# Altium PCB PCB 1.PcbDoc
Units mm, origin at the board's own origin, x right, y up, seen from the top; angles counter-clockwise.
Board outline 100 x 100 mm, 2 copper layers (Top Layer, Bottom Layer); 55 components, 94 nets, 349 pads, 0 vias.
Unrouted connection lines stored in the file: 6.
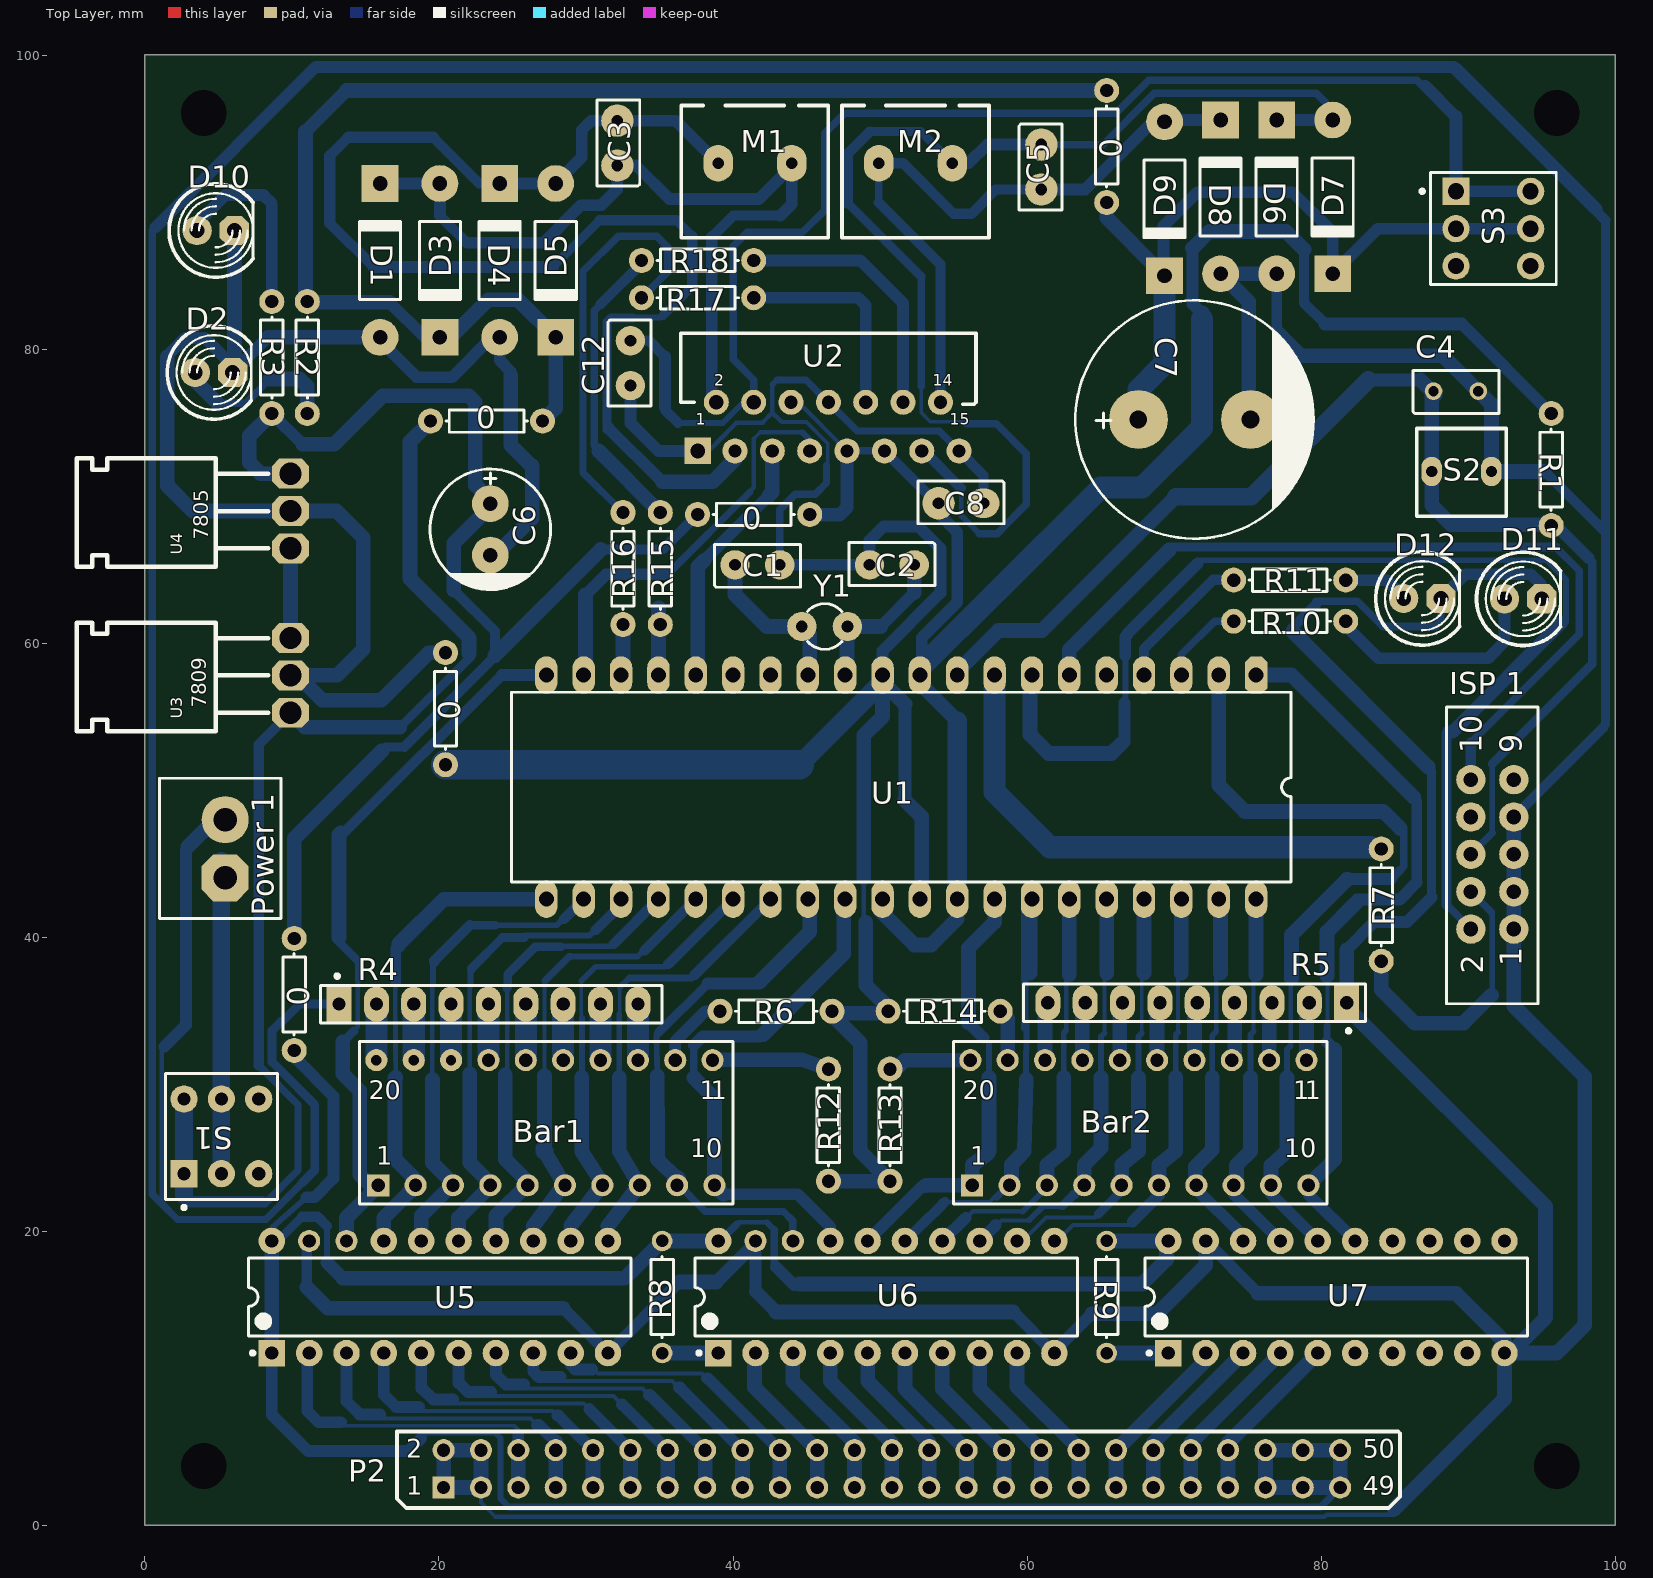
[diagram p0: Top Layer view]
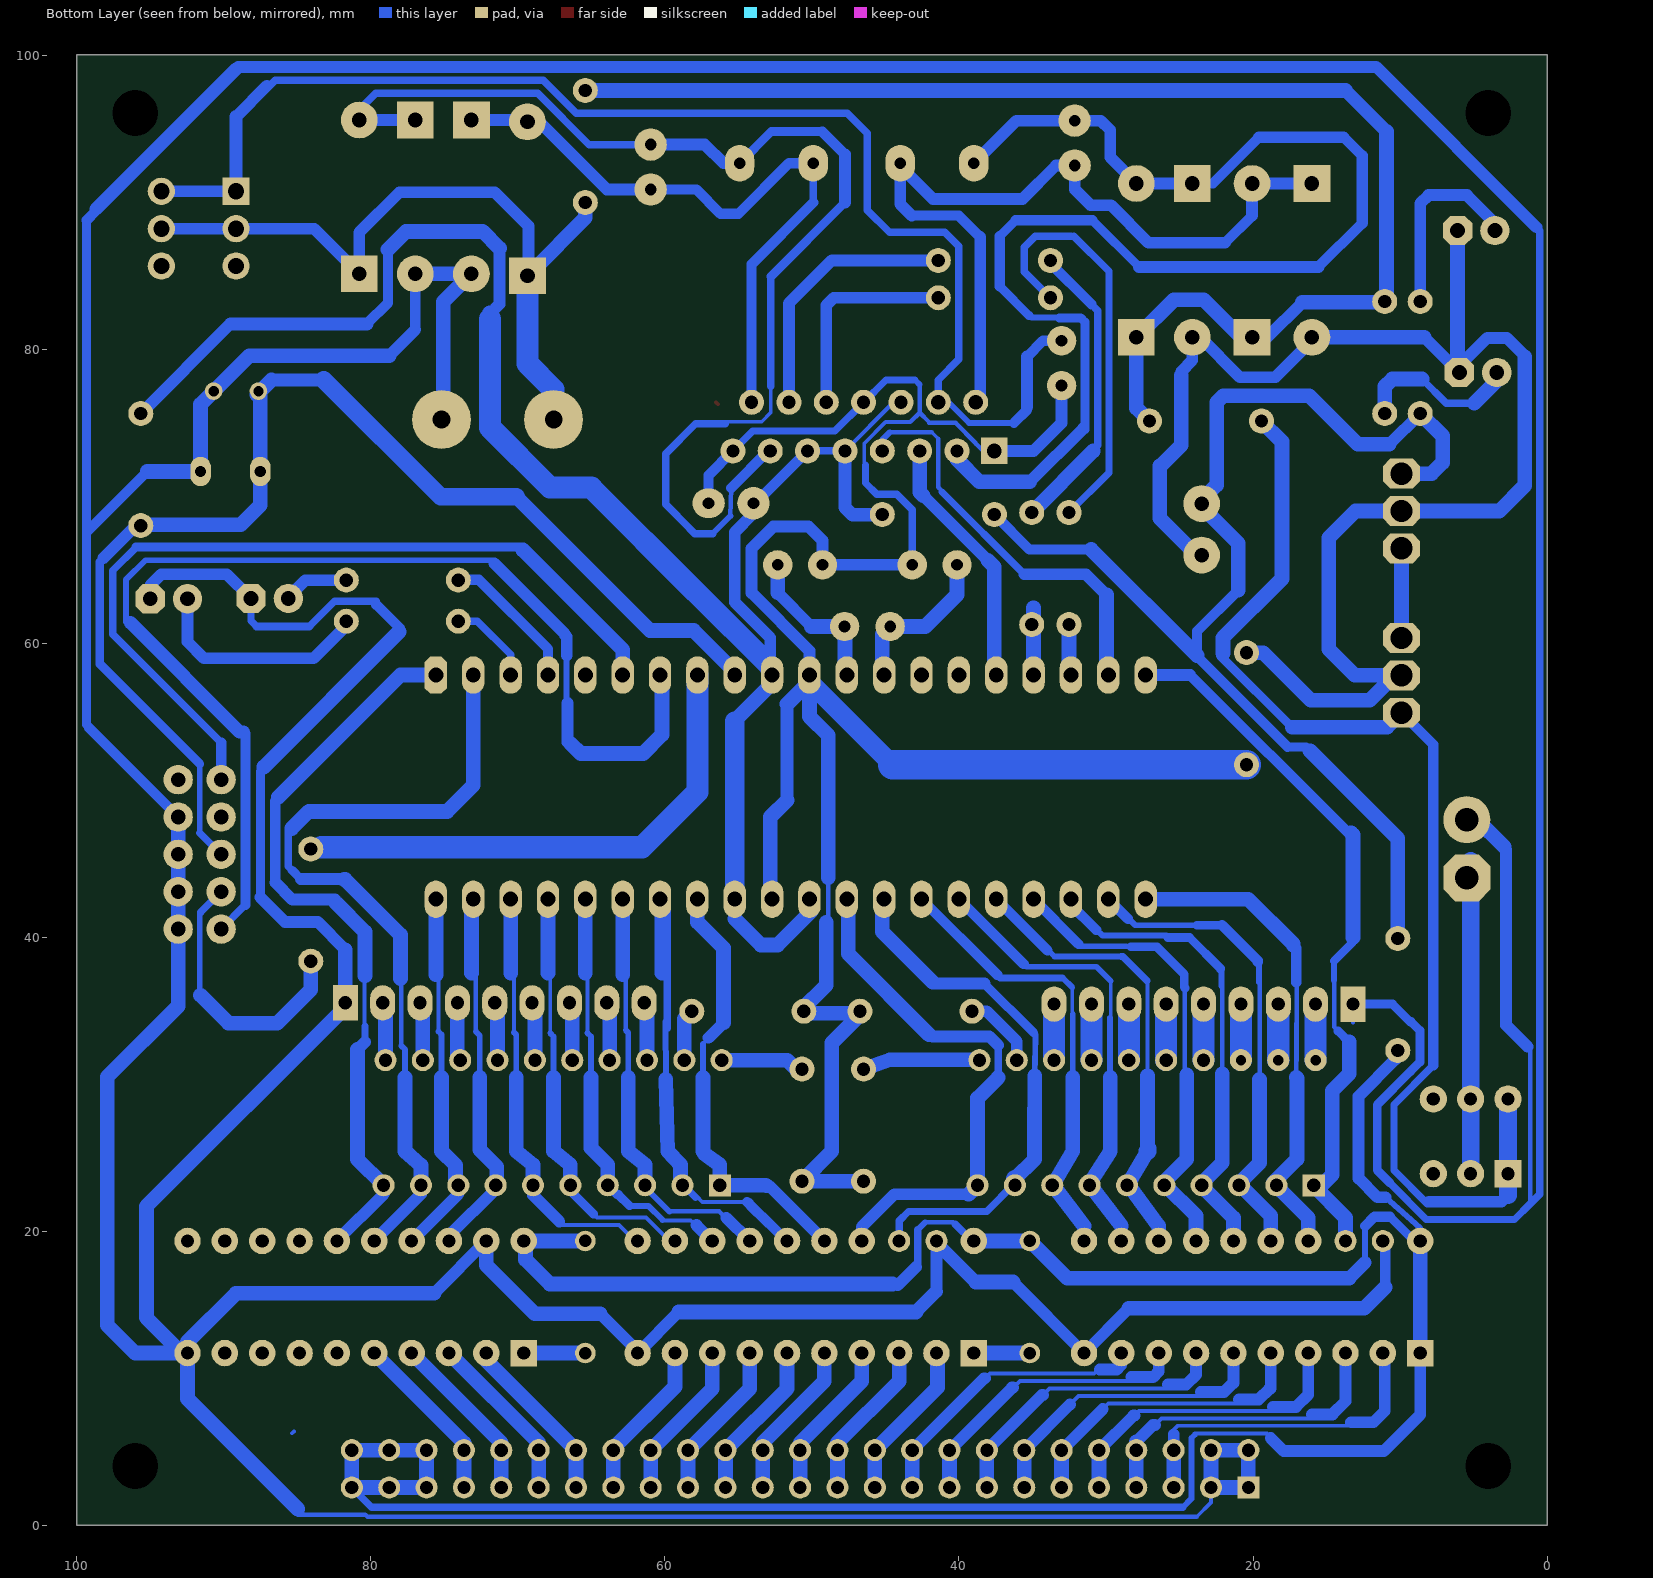
[diagram p1: Bottom Layer view, seen from below]

## Layer stack, top to bottom
Top Solder: solder mask 0.0102, Solder Resist, Dk 3.5
Top Layer: signal copper 0.0356
Dielectric 1: dielectric 0.32, FR-4, Dk 4.8
Bottom Layer: signal copper 0.0356
Bottom Solder: solder mask 0.0102, Solder Resist, Dk 3.5

## Board outline
0,0.041 0,100.041 100,100.041 100,0.041

## Design rules (kind name [scope] priority, off if disabled: settings)
Clearance [All] p1: gap=0.254 ignorepadtopadclearanceinfootprint=FALSE except(0: Arc-Hole Track-Hole SMDPad-Hole THPad-Hole Via-Hole Fill-Hole Poly-Hole Region-Hole Text-Hole)
PolygonConnect [All] p1: connectstyle=Relief reliefconductorwidth=0.254 reliefentries=4 polygonreliefangle="90 Angle" airgapwidth=0.254
RoutingLayers [All] p1: top layer_v5=FALSE bottom layer_v5=TRUE
RoutingVias [All] p1: holewidth=0.711 width=1.27 viastyle="Through Hole" minholewidth=0.711 minwidth=1.27 maxholewidth=0.711 maxwidth=1.27
SolderMaskExpansion [All] p1: expansion=0.102
Width [All] p1: maxlimit=2 minlimit=0.254 preferedwidth=0.254
29 further rules are at their usual default settings.

## Components (designator, comment, footprint, x,y, rotation, side; value= is the part's Value field where it differs from the comment)
Bar1 "Bar" "Bar 10z2"#1 26.924,27.473 r270 top
Bar2 "Bar" "Bar 10z2"#2 67.31,27.473 r270 top
C1 "" Cap#1 41.656,65.342 r0 top
C2 "" Cap#1 50.8,65.342 r180 top
C3 "" Cap#2 32.131,94.021 r90 top
C4 "" Cap#3 89.154,77.153 r0 top
C5 "" Cap#2 60.96,92.393 r270 top
C6 "+" "cap 03" 23.495,67.755 r90 top
C7 "+" "CAP 05" 71.374,75.225 r180 top
C8 "" Cap#4 55.499,69.533 r180 top
C12 "" Cap#1 33.02,79.058 r270 top
D1 "1N4007" DO-41 16.002,86.043 r90 top
D2 "LED" MY_LED5MM 4.699,78.423 r0 top
D3 "1N4007" DO-41 20.066,86.043 r270 top
D4 "1N4007" DO-41 24.13,86.043 r90 top
D5 "1N4007" DO-41 27.94,86.043 r270 top
D6 "1N4007" DO-41 76.962,90.361 r90 top
D7 "1N4007" DO-41 80.772,90.361 r270 top
D8 "1N4007" DO-41 73.152,90.361 r90 top
D9 "1N4007" DO-41 69.342,90.234 r270 top
D10 "LED" MY_LED5MM 4.826,88.075 r0 top
D11 "LED" MY_LED5MM 93.726,63.033 r0 top
D12 "LED" MY_LED5MM 86.868,63.056 r0 top
"ISP 1" "ISP 5X2" ISP 91.694,45.657 r90 top
M1 "Terminal" "Terminal 1*2" 46.482,96.584 r180 top
M2 "Terminal" "Terminal 1*2" 57.404,96.584 r180 top
P2 "Header 25X2H" Header 49.53,3.747 r0 top
"Power 1" "" Power 5.08,47.562 r90 top
R1 "" AXIAL-0.3#1 95.631,71.819 r90 top
R2 "1K" AXIAL-0.3#1 11.049,79.439 r270 top
R3 "220" AXIAL-0.3#1 8.636,79.439 r90 top
R4 "Resistor Array" "Res arrya" 13.208,35.474 r0 top
R5 "Resistor Array" "Res arrya" 81.724,35.56 r180 top
R6 "220" AXIAL-0.3#1 42.926,34.989 r0 top
R7 "" AXIAL-0.3#1 84.074,42.205 r90 top
R8 "" AXIAL-0.3#2 35.179,15.558 r270 top
R9 "" AXIAL-0.3#2 65.405,15.558 r270 top
R10 "" AXIAL-0.3#1 77.851,61.509 r180 top
R11 "" AXIAL-0.3#1 77.851,64.303 r180 top
R12 "220" AXIAL-0.3#1 46.482,27.242 r270 top
R13 "220" AXIAL-0.3#1 50.673,27.242 r270 top
R14 "220" AXIAL-0.3#1 54.356,34.989 r180 top
R15 "" AXIAL-0.3#1 35.052,65.088 r270 top
R16 "" AXIAL-0.3#1 32.512,65.088 r270 top
R17 "0" AXIAL-0.3#1 37.592,83.503 r0 top
R18 "0" AXIAL-0.3#1 37.592,86.043 r0 top
S1 "SW-DPDT" DPDT-6#1 5.207,26.48 r90 top
S2 "PB-2pin" PB-2pin 86.487,68.644 r0 top
S3 "SW-DPDT" DPDT-6#2 91.694,88.202 r0 top
U1 "ATmega16-16PI" My_40P6 51.435,50.229 r180 top
U2 "L298N" L298 46.482,88.964 r0 top
U5 "HD74HC245P" PRDP0020AC-B#1 20.066,15.558 r90 top
U6 "HD74HC245P" PRDP0020AC-B#1 50.419,15.558 r90 top
U7 "HD74HC245P" PRDP0020AC-B#2 81.026,15.558 r90 top
Y1 "XTAL" R38 46.228,61.151 r90 top

## Footprints (in the part's own frame and the unit in brackets; to place one, negate y for a bottom-side part, rotate by r counter-clockwise, add the part's x,y. Pads: shape width x height; smd on the part's side, far side on the other; paste and mask are expansions set on the pad)
AXIAL-0.3#1 [mm] "Axial Device, Thru-Hole; 2 Leads; 0.3 in Pin Spacing"
  round 1.7 hole 0.9: 1(-3.81,0) 2(3.81,0)
  silkscreen extent -2.77,-0.76 2.77,0.76
AXIAL-0.3#2 [mm] "Axial Device, Thru-Hole; 2 Leads; 0.3 in Pin Spacing"
  round 1.4 hole 0.85: 1(-3.81,0) 2(3.81,0)
  silkscreen extent -2.77,-0.76 2.77,0.76
"Bar 10z2"#1 [mm]
  rect 1.5x1.5 hole 0.9: 1(4.318,-11.049)
  round 1.5 hole 0.9: 2(4.318,-8.509) 3(4.318,-5.969) 4(4.318,-3.429) 5(4.318,-0.889) 6(4.318,1.651) 7(4.318,4.191) 8(4.318,6.731) 9(4.318,9.271) 10(4.318,11.811) 11(-4.191,11.684) 12(-4.191,9.144) 13(-4.191,6.604) 14(-4.191,4.064) 15(-4.191,1.524) 16(-4.191,-1.016) 17(-4.191,-3.556)
  round 1.5 hole 0.7: 18(-4.191,-6.096) 19(-4.191,-8.636) 20(-4.191,-11.176)
  silkscreen extent -5.46,-12.32 5.59,13.08
"Bar 10z2"#2 [mm]
  rect 1.5x1.5 hole 0.9: 1(4.318,-11.049)
  round 1.5 hole 0.9: 2(4.318,-8.509) 3(4.318,-5.969) 4(4.318,-3.429) 5(4.318,-0.889) 6(4.318,1.651) 7(4.318,4.191) 8(4.318,6.731) 9(4.318,9.271) 10(4.318,11.811) 11(-4.191,11.684) 12(-4.191,9.144) 13(-4.191,6.604) 14(-4.191,4.064) 15(-4.191,1.524) 16(-4.191,-1.016) 17(-4.191,-3.556) 18(-4.191,-6.096) 19(-4.191,-8.636) 20(-4.191,-11.176)
  silkscreen extent -5.46,-12.32 5.59,13.08
Cap#1 [mm]
  round 2 hole 0.8: 1(1.524,0) 2(-1.524,0)
  silkscreen extent -2.92,-1.52 2.92,1.4
Cap#2 [mm]
  round 2.2 hole 0.8: 1(1.524,0) 2(-1.524,0)
  silkscreen extent -2.92,-1.52 2.92,1.4
Cap#3 [mm]
  round 1.2 hole 0.7: 1(1.524,0) 2(-1.524,0)
  silkscreen extent -2.92,-1.52 2.92,1.4
Cap#4 [mm]
  round 2.2 hole 0.8: 1(1.524,0)
  oval 2.2x2 hole 0.8: 2(-1.524,0)
  silkscreen extent -2.92,-1.52 2.92,1.4
"cap 03" [mm]
  round 2.5 hole 1: 1(1.75,0) 2(-1.75,0)
  silkscreen extent -4.1,-4.1 4.1,4.1, body extent -4.05,-4.04 4,4.01, height 12.03
"CAP 05" [mm]
  round 4 hole 1.2: 1(3.81,0) 2(-3.81,0)
  silkscreen extent -8.1,-8.1 8.1,8.1, body extent -8.13,-8.13 8.12,8.12, height 16.53
DO-41 [mm] "Diode, Axial; Body 5.2 x 2.7 mm (LxDia. max), Lead Dia. 0.86 mm (max)"
  round 2.5 hole 1: 1(-5.23,0)
  rect 2.5x2.5 hole 1: 2(5.23,0)
  silkscreen extent -2.65,-1.4 2.75,1.4
DPDT-6#1 [mm] "Switch; 6 Leads"
  rect 1.85x1.85 hole 0.9: 1(-2.54,2.54)
  round 1.85 hole 0.9: 2(-2.54,0) 3(-2.54,-2.54) 4(2.54,-2.54) 5(2.54,0) 6(2.54,2.54)
  silkscreen extent -4.96,-3.81 4.28,3.81
DPDT-6#2 [mm] "Switch; 6 Leads"
  rect 1.85x1.85 hole 1.1: 1(-2.54,2.54)
  round 1.85 hole 1.1: 2(-2.54,0) 3(-2.54,-2.54) 4(2.54,-2.54) 5(2.54,0) 6(2.54,2.54)
  silkscreen extent -4.96,-3.81 4.28,3.81
Header [mm]
  rect 1.5x1.5 hole 0.9: 1(-29.21,-1.143)
  round 1.5 hole 0.9: 2(-29.21,1.397) 3(-26.67,-1.143) 4(-26.67,1.397) 5(-24.13,-1.143) 6(-24.13,1.397) 7(-21.59,-1.143) 8(-21.59,1.397) 9(-19.05,-1.143) 10(-19.05,1.397) 11(-16.51,-1.143) 12(-16.51,1.397) 13(-13.97,-1.143) 14(-13.97,1.397) 15(-11.43,-1.143) 16(-11.43,1.397) 17(-8.89,-1.143) 18(-8.89,1.397) 19(-6.35,-1.143) 20(-6.35,1.397) 21(-3.81,-1.143) 22(-3.81,1.397) 23(-1.27,-1.143) 24(-1.27,1.397) 25(1.27,-1.143) 26(1.27,1.397) 27(3.81,-1.143) 28(3.81,1.397) 29(6.35,-1.143) 30(6.35,1.397) 31(8.89,-1.143) 32(8.89,1.397) 33(11.43,-1.143) 34(11.43,1.397) 35(13.97,-1.143) 36(13.97,1.397) 37(16.51,-1.143) 38(16.51,1.397) 39(19.05,-1.143) 40(19.05,1.397) 41(21.59,-1.143) 42(21.59,1.397) 43(24.13,-1.143) 44(24.13,1.397) 45(26.67,-1.143) 46(26.67,1.397) 47(29.21,-1.143) 48(29.21,1.397) 49(31.75,-1.143) 50(31.75,1.397)
  Bottom Layer lines w0.254: 35.687,2.667 35.814,2.54
  silkscreen extent -32.38,-2.54 35.81,2.67
ISP [mm]
  round 2 hole 1: 1(-5.08,-1.397) 2(-5.08,1.524) 3(-2.54,-1.397) 4(-2.54,1.524) 5(0,-1.397) 6(0,1.524) 7(2.54,-1.397) 8(2.54,1.524) 9(5.08,-1.397) 10(5.08,1.524)
  silkscreen extent -10.16,-3.05 10.03,3.18
L298 [mm]
  rect 1.8x1.8 hole 1: 1(-8.89,-15.875)
  round 1.7 hole 1: 2(-7.62,-12.568) 4(-5.08,-12.568)
  round 1.7 hole 0.9: 3(-6.35,-15.875) 5(-3.81,-15.875) 6(-2.54,-12.568) 7(-1.27,-15.875) 8(0,-12.568) 9(1.27,-15.875) 10(2.54,-12.568) 11(3.81,-15.875) 12(5.08,-12.568) 13(6.35,-15.875) 14(7.62,-12.568) 15(8.89,-15.875)
  Top Layer lines w0.254: 9.906,-12.7 10.033,-12.573
  silkscreen extent -10.03,-12.7 10.03,-7.87
My_40P6 [mil]
  oct 60x100 hole 40: 1(-950,-300)
  oval 60x100 hole 40: 2(-850,-300) 3(-750,-300) 4(-650,-300) 5(-550,-300) 6(-450,-300) 7(-350,-300) 8(-250,-300) 9(-150,-300) 10(-50,-300) 11(50,-300) 12(150,-300) 13(250,-300) 14(350,-300) 15(450,-300) 16(550,-300) 17(650,-300) 18(750,-300) 19(850,-300) 20(950,-300) 21(950,300) 22(850,300) 23(750,300) 24(650,300) 25(550,300) 26(450,300) 27(350,300) 28(250,300) 29(150,300) 30(50,300) 31(-50,300) 32(-150,300) 33(-250,300) 34(-350,300) 35(-450,300) 36(-550,300) 37(-650,300) 38(-750,300) 39(-850,300) 40(-950,300)
  silkscreen extent -1043,-254 1043,254
MY_LED5MM [mm]
  round 2 hole 1: A(-1.27,0)
  oct 2x2 hole 1: K(1.27,0)
  silkscreen extent -3.17,-3.17 2.54,3.17
PB-2pin [mil] "Switch"
  oval 55.12x78.74 hole 30: 1(40,120) 2(200,120)
  silkscreen extent 0,0 240,235
Power [mm]
  oct 3.2x3.2 hole 1.6: 1(-3.503,-0.381)
  round 3.2 hole 1.6: 2(0.455,-0.381)
  silkscreen extent -6.25,-4.19 3.27,4.06
PRDP0020AC-B#1 [mm] "DIP, 20-Leads, Row Spacing 7.62mm, Pitch 2.54mm, Body 24.5x6.3mm"
  rect 1.8x1.8 hole 0.9: 1(-3.81,11.43)
  round 1.8 hole 0.9: 2(-3.81,8.89) 3(-3.81,6.35) 4(-3.81,3.81) 5(-3.81,1.27) 6(-3.81,-1.27) 7(-3.81,-3.81) 8(-3.81,-6.35) 9(-3.81,-8.89) 10(-3.81,-11.43) 11(3.81,-11.43) 12(3.81,-8.89) 13(3.81,-6.35) 14(3.81,-3.81) 15(3.81,-1.27) 16(3.81,1.27) 17(3.81,3.81) 20(3.81,11.43)
  round 1.5 hole 0.9: 18(3.81,6.35) 19(3.81,8.89)
  silkscreen extent -3.93,-13 2.65,13, body extent -3.6,-12.95 3.6,12.95, height 5.08
PRDP0020AC-B#2 [mm] "DIP, 20-Leads, Row Spacing 7.62mm, Pitch 2.54mm, Body 24.5x6.3mm"
  rect 1.8x1.8 hole 0.9: 1(-3.81,11.43)
  round 1.8 hole 0.9: 2(-3.81,8.89) 3(-3.81,6.35) 4(-3.81,3.81) 5(-3.81,1.27) 6(-3.81,-1.27) 7(-3.81,-3.81) 8(-3.81,-6.35) 9(-3.81,-8.89) 10(-3.81,-11.43) 11(3.81,-11.43) 12(3.81,-8.89) 13(3.81,-6.35) 14(3.81,-3.81) 15(3.81,-1.27) 16(3.81,1.27) 17(3.81,3.81) 18(3.81,6.35) 19(3.81,8.89) 20(3.81,11.43)
  silkscreen extent -3.93,-13 2.65,13, body extent -3.6,-12.95 3.6,12.95, height 5.08
R38 [mm] "Crystal, Thru-Hole; 2 Leads; Body 3.1 x 8.2 mm (Dia.xH)"
  round 2 hole 0.8: 1(0,1.55) 2(0,-1.55)
  silkscreen extent -1.55,-1.19 1.55,1.17
"Res arrya" [mm] "Resistor; Array;"
  rect 1.7x2.4 hole 0.9: 1(0,0)
  oval 1.7x2.4 hole 0.9: 2(2.54,0) 3(5.08,0) 4(7.62,0) 5(10.16,0) 6(12.7,0) 7(15.24,0) 8(17.78,0) 9(20.32,0)
  silkscreen extent -1.27,-1.27 21.97,2.03
"Terminal 1*2" [mil]
  oval 78.74x98.43 hole 30: 1(98.15,155) 2(295,155)
  silkscreen extent 0,0 394,354

## Part data
C1 C2 C3 C4 C5 C6 C7 C8 C12: library part Cap, "Capacitor"
D1 D3 D4 D5 D6 D7 D8 D9: library part "Diode 1N4007", "1 Amp General Purpose Rectifier"
D2 D10 D11 D12: "Typical INFRARED GaAs LED"
"ISP 1": library part "IDC 5X2", "Header, 5-Pin, Dual row"
M1 M2: library part "Terminal 1*2", "Terminal 2 Pin 250VAC 16A"
P2: "Header, 25-Pin, Dual row, Right Angle"
"Power 1": library part Power
R1 R2 R3 R6 R7 R8 R9 R10 R11 R12 R13 R14 R15 R16 R17 R18: library part Res1, "Resistor"
R4 R5: library part RES-A8
S1 S3: "Double-Pole, Double-Throw Switch"
S2: "Switch"
U1: "AVR 16K Bytes of In-System Programmable Flash Memory"
U2: "Dual Full Bridge Driver"
U5 U6 U7: "Octal Bus Transceivers with 3-State Outputs"
Y1: "Crystal Oscillator"

## Free pads (board coordinates)
  oct 0x0 hole 3.1: 1(4,4.064) 1(4,96.064) 1(96,4.064) 1(96,96.064)
  oct 2.54x2.032 hole 1.524: 1(9.906,55.286) 1(9.906,66.462) 2(9.906,57.826) 2(9.906,69.002) 3(9.906,60.366) 3(9.906,71.542)
  round 1.7 hole 0.9: 1(20.447,51.753) 1(27.051,75.121) 1(37.592,68.771) 1(65.405,89.98) 2(19.431,75.121) 2(20.447,59.373) 2(45.212,68.771) 2(65.405,97.6) ""(10.16,32.322) ""(10.16,39.942)

## Nets (pads, with @x,y where several pads share a name; then routed paths per layer and width w, separated by ;. In a path a pad name is that pad's centre, name@x,y a point inside that pad or via, vN(x,y) a via of type N, cw(c..) or ccw(c..) an arc to the next point about the centre after c; other vN are vias at no path point)
GND: "ISP 1.1" "ISP 1.3" "ISP 1.5" "ISP 1.7" "Power 1.2" C1.1 C2.1 C4.1 C6.2 C7.2 C8.2 C12.1 D1.1 D2.K D4.1 D6.1 D8.1 D10.K D11.K D12.K P2.1 P2.2 P2.3 P2.4 pad.1@20.447,51.753 pad.2@9.906,57.826 pad.2@9.906,69.002 pad.2@20.447,59.373 R4.1 R5.1 R6.2 R12.2 R13.2 R14.2 S2.2 U1.11 U1.31 U2.1 U2.8 U2.15 U5.10 U5.19 U6.10 U6.19 U7.10 U7.19 | length 909.6
  Bottom Layer w0.254: 4.773,48.017 5.461,48.017 ; D2.K D2.K@5.969,78.867 ; 9.271,34.29 9.334,34.29 9.525,34.29 ; 13.208,34.227 R4.1@13.208,34.862 ; D1.1@16.002,80.582 D1.1 ; P2.3 22.86,1.588 23.832,0.616 ; C6.2 C6.2@23.841,66.005 ; D4.1@23.599,80.813 D4.1 ; 26.29,72.071 26.352,72.071 ; U2.1 U2.1@38.354,73.089 ; 38.851,73.586 38.851,73.62 ; U6.19@41.529,19.241 U6.19 ; 42.037,74.994 42.037,75.057 ; 44.985,75.057 46.443,73.599 46.443,72.224 46.355,72.136 ; 48.895,41.148 49.022,41.021 ; R14.2@50.419,34.862 R14.2 ; U6.10 U6.10@61.849,11.875 ; C7.2@75.057,75.352 C7.2 ; U7.10@92.456,12.51 U7.10 U7.10@92.837,11.748 ; D11.K D11.K@94.996,63.945
  Bottom Layer w0.3: 1.143,21.908 1.143,32.385 1.333,32.575 ; 23.832,0.616 80.217,0.616 80.363,0.762 84.963,0.762 ; U2.1@38.354,73.089 38.851,73.586 ; 38.851,73.62 40.225,74.994 42.037,74.994 ; 42.037,75.057 42.672,75.692 43.307,75.057 44.985,75.057 ; 42.672,75.819 42.672,77.597 ; 48.895,41.148 48.895,44.069
  Bottom Layer w0.4: 42.672,77.597 42.99,77.915
  Bottom Layer w0.5: 0.508,88.075 0.508,22.543 1.143,21.908 2.223,20.828 8.214,20.828 10.673,23.287 ; pad.2@9.906,57.826 pad.2@10.373,57.826 ; 42.99,77.915 44.963,77.915 U2.8 48.435,74.443 54.018,74.443 U2.15 ; C1.1 43.18,69.088 44.237,70.145 45.593,70.145 46.355,70.907 46.355,72.136 ; 79.629,62.865 82.464,62.865 84.178,61.151 ; 87.757,61.151 88.138,61.532 D12.K
  Bottom Layer w0.56: 84.178,61.151 87.757,61.151
  Bottom Layer w0.6: 9.271,34.29 8.651,33.67 8.651,31.545 9.303,30.893 ; 9.3,30.89 11.557,28.633 11.557,24.177 10.67,23.29 ; 9.303,34.259 9.334,34.29 10.518,35.474 R4.1@12.596,35.474 ; U1.11@50.165,57.404 U1.11 ; 87.503,42.736 87.503,51.308 ; 99.314,54.483 99.314,88.773
  Bottom Layer w0.7: 11.011,16.23 U5.19@11.011,19.203 ; U2.15 57.023,71.438 C8.2 ; 76.962,81.344 D6.1 ; 78.018,61.047 79.581,62.611 79.629,62.611 ; 93.091,48.197 99.155,54.261 ; 95.186,71.692 97.838,69.04 99.187,67.691 ; 98.679,89.408 99.314,88.773
  Bottom Layer w0.8: 0.73,88.297 11.635,99.202 89.012,99.202 89.154,99.06 ; 1.333,32.575 2.794,34.036 2.794,45.974 2.921,46.101 ; 1.504,79.522 2.753,80.772 4.064,80.772 D2.K@5.969,78.867 ; D2.K 6.096,78.55 8.359,80.813 ; D1.1@16.002,80.582 18.479,78.105 20.891,78.105 D4.1@23.599,80.813 ; D4.1 24.13,79.248 24.892,78.486 24.892,78.232 ; 28.448,14.796 U5.10 36.322,16.574 ; C12.1 33.02,74.994 34.925,73.089 U2.1 ; 41.529,15.939 U6.19@41.529,19.241 ; C1.1 C2.1 49.276,66.993 50.228,67.945 52.619,67.945 54.102,66.462 54.102,63.437 50.165,59.5 U1.11 ; 59.055,14.542 U6.10 ; U6.10@61.849,11.875 64.389,14.415 ; U7.19 75.692,15.812 ; 76.962,81.344 78.74,79.566 ; 81.724,39.179 83.607,41.062 85.829,41.062 87.503,42.736 ; D12.K 89.789,64.707 94.234,64.707 D11.K@94.996,63.945
  Bottom Layer w0.9: 38.862,16.574 U6.19@41.529,19.241 ; 41.529,15.939 42.926,14.542 ; 51.689,49.34 51.689,55.88 ; 89.154,99.06 98.679,89.535
  Bottom Layer w1: 1.524,79.502 1.524,70.739 3.261,69.002 9.906,69.002 13.04,69.002 14.859,67.183 14.859,59.604 13.081,57.826 10.373,57.826 12.065,56.134 16.065,56.134 19.304,59.373 pad.2@20.447,59.373 ; 2.921,46.165 4.773,48.017 ; D2.K@6.096,78.55 D10.K ; 8.359,80.813 D1.1 ; 11.011,16.23 12.445,14.796 28.448,14.796 ; C6.2@23.841,66.005 26.352,68.516 26.352,72.071 ; 24.892,78.232 24.892,73.469 26.29,72.071 ; 36.322,16.574 38.862,16.574 ; 42.926,14.542 59.055,14.542 ; R12.2 R13.2 48.641,25.464 48.641,32.83 R6.2@46.736,34.735 ; R6.2@46.736,34.862 R14.2@50.419,34.862 ; 48.895,44.069 48.895,53.762 50.165,55.032 50.165,57.404 51.689,55.88 ; 49.022,41.021 49.022,36.767 R14.2@50.673,35.116 ; 51.689,49.34 52.832,48.197 U1.31@52.832,42.609 ; 64.389,14.415 68.834,14.415 72.136,17.717 U7.19 ; C7.2@75.057,75.352 75.057,83.226 D8.1 D6.1@76.685,85.131 ; 75.692,15.812 89.154,15.812 U7.10@92.456,12.51 ; 78.073,60.802 87.281,51.594 ; 78.74,79.566 88.265,79.566 C4.1 91.567,76.264 S2.2 95.186,71.692 ; 81.724,39.179 R5.1 81.724,35.243 95.25,21.717 95.25,14.161 92.837,11.748 96.012,11.748 97.917,13.653 97.917,30.521 93.091,35.347 93.091,40.577 93.091,43.117 93.091,45.657 93.091,48.197 ; 84.963,1.143 92.456,8.636 U7.10 ; P2.1 P2.2 P2.4 P2.3 P2.1
  Bottom Layer w1.3: 44.514,51.753 U1.11@50.165,57.404
  Bottom Layer w2: pad.1@20.447,51.753 44.514,51.753
NetBar1_1: Bar1.1 U1.20 U5.18 | length 49.4
  Bottom Layer w0.254: Bar1.1@15.367,23.114 Bar1.1@15.875,23.114
  Bottom Layer w0.3: 14.224,33.655 14.489,33.92 14.489,37.084
  Bottom Layer w0.4: 14.489,37.084 14.489,38.406
  Bottom Layer w0.55: 13.208,40.005 13.208,39.687 14.489,38.406
  Bottom Layer w0.6: 13.462,32.893 14.224,33.655
  Bottom Layer w0.7: 13.335,47.117 13.543,47.117 24.275,57.849
  Bottom Layer w0.8: 24.275,57.849 U1.20
  Bottom Layer w1: 13.208,40.005 13.208,46.99 13.335,47.117 ; 13.462,32.893 13.462,30.734 14.617,29.579 14.617,23.864 Bar1.1@15.367,23.114 ; U5.18 13.716,20.955 Bar1.1@15.875,23.114
NetBar1_2: Bar1.2 U1.21 U5.17 | length 35.9
  Bottom Layer w0.254: 17.018,36.664 17.057,36.703 17.057,36.957
  Bottom Layer w0.3: 17.018,31.623 17.018,36.664 ; 17.057,30.48 17.057,34.163
  Bottom Layer w0.7: 17.057,36.957 17.057,39.282 17.272,39.497
  Bottom Layer w1: U5.17 16.256,20.955 18.435,23.134 18.626,23.325 17.018,24.933 17.018,30.441 17.057,30.48 ; 17.272,39.497 17.272,39.561 20.32,42.609 U1.21 U1.21@27.432,42.609
NetBar1_3: Bar1.3 U1.22 U5.16 | length 32.4
  Bottom Layer w0.3: 19.558,30.353 19.558,36.918
  Bottom Layer w0.4: 19.597,36.957 19.597,38.266 19.685,38.354 ; 23.806,40.84 28.013,40.84 28.448,41.275
  Bottom Layer w0.6: 22.107,40.84 23.806,40.84
  Bottom Layer w0.7: 19.685,38.354 19.685,38.418 22.107,40.84 ; 28.511,41.275 U1.22
  Bottom Layer w1: U5.16 18.796,21.082 20.912,23.198 20.975,23.261 19.558,24.679 19.558,30.353
NetBar1_4: Bar1.4 U1.23 U5.15 | length 32.3
  Bottom Layer w0.254: 22.098,36.664 22.137,36.703 ; U1.23@32.385,42.228 U1.23
  Bottom Layer w0.3: 22.098,30.734 22.098,36.664
  Bottom Layer w0.4: 22.137,36.703 22.137,37.758 22.225,37.846 ; 25.781,40.005 25.908,40.132 30.226,40.132 30.607,40.513
  Bottom Layer w0.6: 22.225,37.846 22.225,37.91 24.32,40.005 25.781,40.005
  Bottom Layer w0.7: 30.67,40.513 U1.23@32.385,42.228
  Bottom Layer w1: U5.15 21.336,20.955 23.515,23.134 23.579,23.198 22.098,24.679 22.098,28.575 ; 22.098,28.702 22.098,30.734
NetBar1_5: Bar1.5 U1.24 U5.14 | length 31.5
  Bottom Layer w0.3: 24.638,30.734 24.638,36.576
  Bottom Layer w0.4: 28.616,39.411 31.75,39.411
  Bottom Layer w0.6: 24.638,36.576 24.677,36.615 24.677,37.504 26.543,39.37 28.321,39.37
  Bottom Layer w0.7: 31.876,39.56 U1.24
  Bottom Layer w1: U5.14 23.876,21.082 25.992,23.198 26.119,23.325 24.511,24.933 24.511,30.671
NetBar1_6: Bar1.6 U1.25 U5.13 | length 32.1
  Bottom Layer w0.254: 27.178,37.021 27.21,37.053 ; Bar1.6@28.575,22.543 Bar1.6 Bar1.6@28.575,23.409
  Bottom Layer w0.3: 27.178,30.607 27.178,37.021
  Bottom Layer w0.4: 28.978,38.707 33.5,38.707 33.909,39.116
  Bottom Layer w0.5: 27.21,37.053 28.864,38.707 28.978,38.707
  Bottom Layer w0.7: 33.972,39.116 U1.25
  Bottom Layer w1: U5.13 26.416,20.384 Bar1.6@28.369,23.045 ; 27.067,25.664 27.178,25.476 ; 27.178,28.575 27.178,25.476 ; 27.178,28.702 27.178,30.607 ; Bar1.6@28.552,23.141 27.178,25.476
  Bottom Layer w1.2: 27.178,25.464 27.178,25.476
NetBar1_7: Bar1.7 U1.26 U5.12 | length 30.6
  Bottom Layer w0.254: U5.12 28.956,20.384 ; 29.679,34.55 29.679,37.045
  Bottom Layer w0.4: 29.679,37.045 30.648,38.014 35.41,38.014 35.592,38.196 ; 29.718,30.48 29.718,34.55
  Bottom Layer w0.7: 35.592,38.196 U1.26
  Bottom Layer w1: 28.956,20.384 Bar1.7@30.928,22.956 ; 29.718,28.575 29.718,25.464 Bar1.7@30.928,23.543 ; 29.718,28.702 29.718,30.48
NetBar1_8: Bar1.8 U1.27 U5.11 | length 31.2
  Bottom Layer w0.254: U5.11 31.496,20.384 ; 32.297,34.55 32.297,36.615 ; Bar1.8@33.614,23.155 Bar1.8
  Bottom Layer w0.4: 32.258,30.48 32.258,34.804 ; 32.297,36.615 32.934,37.252 32.956,37.252 32.959,37.249 ; 34.167,37.249 34.17,37.252 ; 37.188,37.252 37.401,37.465
  Bottom Layer w0.5: 32.959,37.249 34.167,37.249 ; 34.17,37.252 37.188,37.252
  Bottom Layer w0.7: 37.401,37.465 U1.27
  Bottom Layer w1: 31.496,20.384 33.614,23.155 32.258,25.464 32.258,28.575 ; 32.258,28.702 32.258,30.48
NetBar1_9: Bar1.9 U1.28 U6.18 | length 36.3
  Bottom Layer w0.254: 34.798,33.401 34.925,33.528
  Bottom Layer w0.4: 34.798,33.401 34.843,30.607
  Bottom Layer w0.5: Bar1.9@36.195,23.282 38.1,21.377 43.434,21.377 44.069,20.742 U6.18
  Bottom Layer w0.6: 34.925,33.528 38.268,36.871
  Bottom Layer w0.8: 38.268,36.871 41.57,36.871
  Bottom Layer w1: 34.843,30.607 34.843,29.654 34.861,27.305 34.861,24.931 Bar1.9@36.195,23.597 ; 41.783,36.957 45.212,40.386 U1.28@45.212,42.482
  Bottom Layer w1.2: Bar1.9 36.195,23.282 Bar1.9@36.195,23.597
NetBar1_10: Bar1.10 U1.29 U6.17 | length 36.5
  Bottom Layer w0.254: U1.29@47.53,42.387 U1.29@47.752,42.609
  Bottom Layer w0.5: 37.338,30.48 37.338,32.68
  Bottom Layer w0.8: 37.338,32.68 37.932,33.274 41.783,33.274 41.91,33.401 ; 39.347,22.543 44.386,22.543 46.609,20.32 U6.17
  Bottom Layer w1: 37.338,30.48 38.735,29.083 Bar1.10 39.347,22.543 ; 42.037,33.401 47.53,38.894 U1.29@47.53,42.387
NetBar1_11: Bar1.11 R12.1 | length 7.7
  Bottom Layer w1: Bar1.11@38.862,31.687 44.695,31.687 R12.1
NetBar1_12: Bar1.12 R6.1 | length 5.2
  Bottom Layer w0.8: Bar1.12 36.068,32.934 38.123,34.989 R6.1
NetBar1_13: Bar1.13 R4.9 | length 3.6
  Bottom Layer w1.5: Bar1.13@33.528,31.877 R4.9
NetBar1_14: Bar1.14 R4.8 | length 3.6
  Bottom Layer w1.5: Bar1.14 R4.8@30.988,35.22
NetBar1_15: Bar1.15 R4.7 | length 3.8
  Bottom Layer w1.5: Bar1.15 R4.7
NetBar1_16: Bar1.16 R4.6 | length 3.8
  Bottom Layer w1.5: Bar1.16 R4.6
NetBar1_17: Bar1.17 R4.5 | length 3.8
  Bottom Layer w1.5: Bar1.17 R4.5
NetBar1_18: Bar1.18 R4.4 | length 3.6
  Bottom Layer w1.5: Bar1.18 R4.4@20.828,35.22
NetBar1_19: Bar1.19 R4.3 | length 3.4
  Bottom Layer w1.5: Bar1.19 R4.3@18.288,35.093
NetBar1_20: Bar1.20 R4.2 | length 3.7
  Bottom Layer w1.5: Bar1.20 R4.2@15.748,35.347
NetBar2_1: Bar2.1 U1.33 U6.16 | length 30.1
  Bottom Layer w0.254: U6.16 U6.16@49.149,19.495 ; 57.023,33.147 57.404,32.766 ; 57.328,25.311 57.404,25.464
  Bottom Layer w0.4: 57.404,30.48 57.404,32.766
  Bottom Layer w0.8: U6.16 52.895,23.114 53.086,23.114 ; 56.007,34.204 57.023,33.188
  Bottom Layer w1: 53.086,23.114 53.127,23.155 Bar2.1 56.261,24.552 ; 56.007,34.204 56.007,39.284 57.785,41.062 U1.33 ; 56.274,24.552 57.328,25.311 ; 57.404,25.464 57.404,30.48
NetBar2_2: Bar2.2 U1.34 U6.15 | length 34.3
  Bottom Layer w0.254: 53.721,21.336 54.013,21.628 ; 54.409,22.024 57.457,22.024 57.785,22.352
  Bottom Layer w0.4: 59.932,30.353 59.944,34.29
  Bottom Layer w0.5: 57.912,22.352 Bar2.2@58.928,23.368 ; 59.842,33.811 59.842,42.316 U1.34@60.071,42.545
  Bottom Layer w0.7: U6.15 54.013,21.628 54.409,22.024
  Bottom Layer w1: Bar2.2@58.928,23.368 58.928,24.552 59.805,25.464 59.932,30.353 ; 60.198,37.592 U1.34@60.198,42.609
NetBar2_3: Bar2.3 U1.35 U6.14 | length 30.2
  Bottom Layer w0.3: 55.88,20.955 56.302,21.377 59.69,21.377 ; 62.635,39.14 62.635,37.361 62.658,37.338 62.658,33.702
  Bottom Layer w0.4: 59.69,21.377 Bar2.3@61.341,23.028 ; 62.484,30.48 62.484,33.528 62.658,33.702
  Bottom Layer w0.8: U6.14 55.816,20.955
  Bottom Layer w1: Bar2.3@61.341,23.028 Bar2.3 61.341,24.552 62.484,25.464 62.484,30.48 ; 62.865,37.465 U1.35@62.865,42.355
NetBar2_4: Bar2.4 U1.36 U6.13 | length 30.3
  Bottom Layer w0.254: 57.912,20.447 58.23,20.765 60.161,20.765 ; 65.253,33.503 65.253,39.243
  Bottom Layer w0.4: 60.161,20.802 61.117,21.758 62.398,21.758 ; 65.024,30.48 65.024,33.274 65.253,33.503
  Bottom Layer w0.6: 62.398,21.758 63.16,22.52 63.246,22.52 Bar2.4
  Bottom Layer w0.8: U6.13 57.848,20.447
  Bottom Layer w1: Bar2.4 63.881,24.552 65.024,25.695 65.024,30.48 ; 65.405,37.592 U1.36
NetBar2_5: Bar2.5 U1.37 U6.12 | length 29.9
  Bottom Layer w0.254: U6.12 59.69,19.368 61.279,20.957 64.604,20.957 64.856,21.209 ; Bar2.5@66.421,22.774 Bar2.5 ; 67.793,33.503 67.793,38.481
  Bottom Layer w0.4: 67.564,30.48 67.564,33.274 67.793,33.503
  Bottom Layer w0.6: 64.856,21.209 Bar2.5@66.421,22.774
  Bottom Layer w1: Bar2.5 66.421,24.552 67.564,25.464 67.564,30.48 ; 67.945,37.592 U1.37
NetBar2_6: Bar2.6 U1.38 U6.11 | length 29.5
  Bottom Layer w0.254: U6.11 62.038,19.368 63.119,20.449 67.183,20.449 ; 70.255,33.552 70.255,38.481
  Bottom Layer w0.4: 70.104,30.861 70.104,33.401 70.255,33.552
  Bottom Layer w0.6: Bar2.6@68.961,22.479 Bar2.6
  Bottom Layer w0.8: 67.183,20.701 Bar2.6@68.961,22.479
  Bottom Layer w1: Bar2.6 68.961,24.552 70.104,25.464 70.104,30.48 ; 70.485,37.592 U1.38
NetBar2_7: Bar2.7 U1.39 U7.18 | length 25.8
  Bottom Layer w0.3: 72.85,33.607 72.85,37.719 72.873,37.742 72.873,38.608
  Bottom Layer w0.4: 72.58,30.48 72.58,33.337 72.85,33.607
  Bottom Layer w0.8: Bar2.7@71.438,22.964 U7.18@74.676,19.726
  Bottom Layer w1: Bar2.7@71.438,22.964 71.438,24.425 72.58,25.567 72.58,30.48 ; 73.14,37.592 U1.39@73.14,42.609
NetBar2_8: Bar2.8 U1.40 U7.17 | length 25.4
  Bottom Layer w0.254: Bar2.8@74.041,22.543 Bar2.8 Bar2.8@74.231,23.345
  Bottom Layer w0.3: 75.39,33.607 75.39,37.211 75.413,37.234 75.413,38.075
  Bottom Layer w0.4: 75.184,30.861 75.184,33.401 75.39,33.607
  Bottom Layer w0.8: Bar2.8@74.041,22.543 U7.17
  Bottom Layer w1: Bar2.8@74.231,23.345 74.231,24.511 75.184,25.464 75.184,30.48 ; 75.565,37.465 U1.40
NetBar2_9: Bar2.9 U1.2 U7.16 | length 55.8
  Bottom Layer w0.254: Bar2.9@76.581,22.543 Bar2.9 ; 77.914,37.147 77.978,37.211
  Bottom Layer w0.3: 77.914,32.639 77.914,37.147
  Bottom Layer w0.4: 77.66,30.48 77.66,32.385 77.914,32.639
  Bottom Layer w0.5: 85.344,44.577 85.598,44.831 85.598,47.244
  Bottom Layer w0.6: 84.75,43.983 85.344,44.577
  Bottom Layer w0.8: Bar2.9@76.581,22.543 U7.16 ; 81.788,43.942 81.829,43.983 84.75,43.983
  Bottom Layer w1: U1.2 73.025,50.356 74.803,48.578 84.201,48.578 85.36,47.419 ; Bar2.9 76.581,24.511 77.66,25.464 77.66,30.48 ; 77.978,37.211 77.978,40.196 81.724,43.942 81.788,43.942
NetBar2_10: Bar2.10 U1.1 U7.15 | length 49.2
  Bottom Layer w0.254: 80.391,33.973 80.415,33.997 80.415,37.084
  Bottom Layer w0.5: 80.391,32.893 80.391,33.973
  Bottom Layer w0.7: 86.487,43.752 86.487,49.276
  Bottom Layer w0.8: Bar2.10@79.121,22.543 U7.15 ; 80.391,32.893 80.899,32.385 ; 82.423,42.586 85.321,42.586 86.487,43.752
  Bottom Layer w1: U1.1@75.692,57.849 77.978,57.849 86.265,49.562 ; Bar2.10 80.899,24.933 80.899,32.385 ; 80.391,37.402 80.391,40.386 82.359,42.355
NetBar2_11: Bar2.11 R5.2 | length 4.6
  Bottom Layer w0.254: Bar2.11@78.994,31.052 Bar2.11 ; R5.2@78.994,34.966 R5.2@79.502,35.474
  Bottom Layer w1: Bar2.11 R5.2@78.994,34.966
NetBar2_12: Bar2.12 R5.3 | length 5
  Bottom Layer w0.254: Bar2.12@76.454,31.052 Bar2.12 ; R5.3@76.454,34.966 76.962,35.474 R5.3@76.962,35.855
  Bottom Layer w1: Bar2.12 R5.3@76.454,34.966
NetBar2_13: Bar2.13 R5.4 | length 4.4
  Bottom Layer w0.254: Bar2.13 Bar2.13@74.104,31.854 ; R5.4@74.104,35.156 74.422,35.474 R5.4@74.422,35.855
  Bottom Layer w1: Bar2.13@74.104,31.854 R5.4@74.104,35.156
NetBar2_14: Bar2.14 R5.5 | length 4.4
  Bottom Layer w0.254: R5.5@71.374,34.966 71.882,35.474 R5.5@71.882,35.855
  Bottom Layer w1: Bar2.14 R5.5@71.374,34.966
NetBar2_15: Bar2.15 R5.6 | length 4.4
  Bottom Layer w0.254: R5.6@68.834,34.966 69.342,35.474 R5.6@69.342,35.855
  Bottom Layer w1: Bar2.15 R5.6@68.834,34.966
NetBar2_16: Bar2.16 R5.7 | length 4.6
  Bottom Layer w0.254: Bar2.16@66.294,31.052 Bar2.16@66.675,31.433 ; R5.7@66.294,34.966 R5.7@66.802,35.474
  Bottom Layer w1: Bar2.16 R5.7@66.294,34.966
NetBar2_17: Bar2.17 R5.8 | length 4.4
  Bottom Layer w0.254: R5.8@63.754,35.093 64.262,35.601 R5.8@64.262,35.855
  Bottom Layer w1: Bar2.17 R5.8@63.754,35.093
NetBar2_18: Bar2.18 R5.9 | length 5.9
  Bottom Layer w0.254: R5.9@60.833,35.56 R5.9 ; Bar2.18@61.214,31.052 Bar2.18@61.849,31.687 ; R5.9@61.214,34.966 61.722,35.474 R5.9@61.722,35.855
  Bottom Layer w1: Bar2.18 R5.9@61.214,34.966
NetBar2_19: Bar2.19 R14.1 | length 4.1
  Bottom Layer w0.254: Bar2.19@58.42,31.306 Bar2.19@58.778,31.664
  Bottom Layer w1: R14.1 58.674,34.481 Bar2.19 Bar2.19@58.778,31.664
NetBar2_20: Bar2.20 R13.1 | length 5.7
  Bottom Layer w0.254: R13.1 R13.1@51.077,31.052
  Bottom Layer w1: R13.1@51.077,31.052 51.689,31.664 Bar2.20
NetC1_2: C1.2 U1.13 Y1.1 | length 11.2
  Bottom Layer w0.254: Y1.1 Y1.1@45.212,60.617
  Bottom Layer w1: C1.2 40.132,63.31 42.291,61.151 Y1.1 ; U1.13@45.212,57.595 Y1.1@45.212,60.617
NetC2_2: C2.2 U1.12 Y1.2 | length 10.7
  Bottom Layer w0.254: Y1.2@47.752,61.125 Y1.2
  Bottom Layer w0.8: 50.038,61.151 52.324,63.437
  Bottom Layer w1: U1.12@47.752,57.849 Y1.2@47.752,61.125 ; Y1.2 50.038,61.151 ; 52.324,63.437 C2.2
NetC3_1: C3.1 D4.2 D5.1 M1.2 U2.3 | length 93.1
  Bottom Layer w0.254: 22.749,91.273 D4.2 ; 33.163,82.136 33.196,82.169
  Bottom Layer w0.4: 33.196,82.169 35.052,82.169
  Bottom Layer w0.6: 27.749,85.598 30.924,88.773 ; 31.432,74.549 31.432,81.851 31.717,82.136 33.163,82.136 ; 35.242,82.296 37.221,84.275 ; 36.132,88.773 37.221,87.684
  Bottom Layer w0.7: 12.573,88.582 15.557,85.598 ; 12.573,93.155 13.843,94.425 ; 19.597,94.425 22.749,91.273 ; 30.924,88.773 36.132,88.773 ; 37.221,84.275 37.221,87.684
  Bottom Layer w0.8: 12.573,88.582 12.573,93.155 ; 13.843,94.425 19.597,94.425 ; 15.557,85.598 27.749,85.598 ; D4.2 D5.1 29.718,93.051 29.718,94.91 30.353,95.545 C3.1 36.091,95.545 M1.2 ; 31.527,74.645 35.179,70.993
  Bottom Layer w1: 35.179,70.993 38.608,70.993 40.132,72.517 U2.3
NetC3_2: C3.2 D1.2 D3.1 M1.1 U2.2 | length 56.4
  Bottom Layer w0.254: U2.2@38.544,76.714 U2.2 ; M1.1@43.989,92.44 M1.1
  Bottom Layer w0.7: 20.066,89.09 21.907,87.249 ; 38.544,87.63 40.005,89.091 43.203,89.091
  Bottom Layer w0.8: D1.2 D3.1 20.066,89.09 ; 21.907,87.249 27.114,87.249 29.654,89.789 31.051,89.789 32.131,90.869 C3.2 33.401,92.497 35.687,90.211 41.76,90.211 43.989,92.44 43.989,89.877 43.203,89.091 ; U2.2@38.544,76.714 38.544,87.63
NetC4_2: "ISP 1.6" C4.2 R1.1 S2.1 U1.9 | length 85.6
  Bottom Layer w0.254: U1.9@54.737,57.849 U1.9@54.991,57.849 ; U1.9@55.003,57.837 U1.9@54.991,57.849 ; U1.9 55.014,57.849 U1.9@54.991,57.849 ; 98.171,65.786 98.425,65.532
  Bottom Layer w0.4: 91.624,47.111 91.624,51.81
  Bottom Layer w0.5: 90.17,45.657 91.624,47.111
  Bottom Layer w0.6: 91.624,51.81 98.425,58.611 98.425,65.532
  Bottom Layer w0.8: R1.1@95.905,68.072 98.171,65.806
  Bottom Layer w0.9: 83.185,77.915 86.741,77.915
  Bottom Layer w1: U1.9@55.003,57.837 55.014,57.849 58.039,60.874 61.001,60.874 70.104,69.977 ; 86.741,77.915 C4.2@87.503,77.153 ; C4.2@87.757,76.899 C4.2@87.503,77.153 ; R1.1@95.905,68.072 88.837,68.072 87.503,69.406 S2.1 C4.2@87.503,77.153
  Bottom Layer w1.2: 70.104,69.977 75.247,69.977 83.185,77.915
NetC5_1: C5.1 D8.2 D9.1 M2.2 U2.14 | length 45.3
  Bottom Layer w0.254: D9.1@68.54,95.464 D9.1 D9.1@69.469,95.591
  Bottom Layer w0.5: 49.911,89.98 M2.2
  Bottom Layer w0.7: 49.911,89.98 54.102,85.789 U2.14 ; M2.2 51.562,92.647 54.991,89.218 56.217,89.218 57.868,90.869 C5.1
  Bottom Layer w0.8: C5.1 63.945,90.869 D9.1@68.54,95.464 ; D9.1@69.469,95.591 D8.2
NetC5_2: C5.2 D6.2 D7.1 M2.1 U2.13 | length 85.1
  Bottom Layer w0.254: 52.793,77.47 52.793,75.692 53.411,75.074 55.736,75.074 55.88,74.93 ; M2.1 56.007,92.647 ; D6.2@76.096,95.591 D6.2 ; D7.1 D7.1@80.772,96.286
  Bottom Layer w0.3: 55.479,70.569 55.542,68.664
  Bottom Layer w0.4: 55.542,68.664 56.752,67.454
  Bottom Layer w0.5: 52.793,77.47 52.793,84.939 ; 55.88,74.93 57.912,74.93 59.944,72.898 59.944,69.469 58.293,67.818 ; 56.752,67.454 57.957,67.454 58.293,67.79 ; C5.2 65.151,93.917 68.643,97.409 79.649,97.409 D7.1@80.772,96.286
  Bottom Layer w0.6: 47.752,89.98 52.793,84.939 ; 49.299,94.806 52.752,94.806 M2.1
  Bottom Layer w0.7: 47.752,93.259 49.299,94.806 ; U2.13 52.959,73.089 55.479,70.569
  Bottom Layer w0.8: 47.752,89.98 47.752,93.259 ; 56.007,92.647 57.277,93.917 C5.2 ; D6.2 D7.1
NetC7_1: C7.1 D3.2 D5.2 D7.2 D9.2 pad.1@9.906,55.286 pad.1@27.051,75.121 pad.1@65.405,89.98 pad.2@19.431,75.121 pad.2@65.405,97.6 R2.1 S1.1 S1.6 S3.2 S3.5 | length 225.2
  Bottom Layer w0.254: S1.6@2.413,29.02 S1.6@2.667,28.766 ; D3.2@19.027,80.813 D3.2 D3.2@20.805,80.813 ; D9.2@69.025,85.321 D9.2@69.278,85.575
  Bottom Layer w0.5: 7.747,31.306 10.414,28.639 10.414,24.171 8.151,21.908
  Bottom Layer w0.6: 17.336,54.293 17.353,54.293 22.225,59.165
  Bottom Layer w0.7: 7.747,31.306 7.747,53.127 pad.1@9.906,55.286
  Bottom Layer w0.8: 3.116,22.03 8.029,22.03 ; 16.637,83.203 D3.2@19.027,80.813 ; D9.2@69.278,85.575 69.278,88.392 71.564,90.678 78.041,90.678 80.772,87.947 D7.2 83.843,88.202 S3.2 S3.5
  Bottom Layer w0.9: 10.922,94.806 13.716,97.6
  Bottom Layer w1: pad.1@9.906,55.286 10.899,54.293 17.336,54.293 ; R2.1@10.922,83.376 10.922,94.806 ; R2.1@11.095,83.203 16.637,83.203 ; 13.716,97.6 pad.2@65.405,97.6 ; pad.2@19.431,75.121 18.034,73.724 18.034,64.389 22.051,60.372 22.051,59.339 ; D3.2@20.805,80.813 23.368,83.376 25.377,83.376 D5.2 27.94,76.01 pad.1@27.051,75.121 ; pad.1@65.405,89.98 65.405,88.941 69.025,85.321 D9.2 ; C7.1 67.564,77.257
  Bottom Layer w1.2: 2.667,22.479 S1.1 S1.6@2.667,28.766
  Bottom Layer w1.5: 67.564,77.257 69.342,79.035 D9.2
NetC12_2: C12.2 S3.1 S3.6 U2.4 | length 92.5
  Bottom Layer w0.254: 35.369,75.884 35.369,76.073 ; U2.4@40.709,76.396 U2.4
  Bottom Layer w0.4: 36.259,74.994 39.307,74.994 U2.4@40.709,76.396
  Bottom Layer w0.5: U2.4 41.402,77.915 40.005,79.312 40.005,86.995 40.958,87.948 44.727,87.948 46.228,89.449 46.228,94.679 47.602,96.053 66.017,96.053 68.262,98.298 86.487,98.298 86.868,97.917
  Bottom Layer w0.7: C12.2 34.289,80.582 35.369,79.502 ; 35.369,75.884 36.259,74.994
  Bottom Layer w0.8: 35.369,76.073 35.369,79.502 ; 87.059,97.917 89.154,95.822 ; S3.1 S3.6
  Bottom Layer w0.9: S3.1 89.154,95.822
NetD2_A: D2.A R2.2 | length 11.6
  Bottom Layer w0.254: D2.A@3.429,77.851 D2.A
  Bottom Layer w0.5: 4.953,76.327 6.858,76.327 8.509,77.978
  Bottom Layer w1: D2.A@3.429,77.851 4.953,76.327 ; 8.509,77.978 10.541,77.978 11.049,77.47 R2.2
NetD10_A: D10.A R3.2 | length 13.3
  Bottom Layer w0.8: D10.A 3.556,88.583 5.461,90.488 8.064,90.488 8.636,89.916 R3.2
NetD11_A: D11.A R10.1 | length 15.3
  Bottom Layer w0.8: R10.1@81.534,61.341 83.883,58.992 91.336,58.992 92.456,60.112 D11.A
NetD12_A: D12.A R11.1 | length 4.5
  Bottom Layer w0.254: D12.A D12.A@85.598,63.16
  Bottom Layer w0.8: R11.1 84.455,64.303 D12.A@85.598,63.16
"NetISP 1_2": "ISP 1.2" U1.7 | length 78.4
  Bottom Layer w0.4: 66.675,56.134 66.675,59.182 ; 71.628,65.659 95.314,65.659 96.647,64.326 96.647,61.468
  Bottom Layer w0.5: 88.519,42.228 90.17,40.577
  Bottom Layer w0.7: 88.519,42.228 88.519,53.848 88.646,53.975
  Bottom Layer w0.8: 66.612,53.277 66.612,55.943 ; 66.675,59.182 66.675,60.452 66.802,60.579 66.802,60.643 71.596,65.437
  Bottom Layer w0.9: 88.646,53.975 88.9,53.975 96.329,61.404
  Bottom Layer w1: U1.7@60.198,57.849 60.198,53.785 61.468,52.515 65.723,52.515 66.421,53.213
"NetISP 1_4": "ISP 1.4" R7.1 | length 18.8
  Bottom Layer w0.4: 91.567,36.068 91.624,36.125 91.624,41.663 91.567,41.72
  Bottom Layer w0.5: 90.17,43.117 91.567,41.72
  Bottom Layer w0.6: 89.408,34.163 89.662,34.163
  Bottom Layer w1: R7.1 84.074,36.449 86.36,34.163 89.408,34.163 ; 89.662,34.163 91.567,36.068
"NetISP 1_10": "ISP 1.10" U1.6 | length 57.2
  Bottom Layer w0.5: 90.17,53.254 97.536,60.62 97.536,64.96 95.948,66.548
  Bottom Layer w0.6: 69.596,66.548 95.948,66.548
  Bottom Layer w0.7: 90.17,50.737 90.17,53.254
  Bottom Layer w1: U1.6 62.865,59.563 69.659,66.358
NetP2_5: P2.5 P2.6 U5.2 | length 22.6
  Bottom Layer w0.254: 13.335,6.795 25.145,6.795 25.4,6.54 25.4,6.223
  Bottom Layer w0.8: U5.2@11.049,11.748 11.049,7.807 11.811,7.045 13.335,7.045 ; P2.6 25.4,6.223
  Bottom Layer w1: P2.5 P2.6
NetP2_7: P2.7 P2.8 U5.3 | length 21.5
  Bottom Layer w0.254: 16.098,7.303 26.225,7.303 26.67,6.858
  Bottom Layer w0.8: U5.3 13.716,8.465 14.605,7.576 16.002,7.576 ; 26.67,6.858 26.797,6.858 P2.8@27.94,5.715
  Bottom Layer w1: P2.7 P2.8 P2.8@27.94,5.715
NetP2_9: P2.9 P2.10 U5.4 | length 21
  Bottom Layer w0.254: 18.638,7.811 27.749,7.811 28.067,7.493
  Bottom Layer w0.8: U5.4 16.256,8.909 17.081,8.084 18.638,8.084 ; 28.067,7.493 28.131,7.493 P2.10
  Bottom Layer w1: P2.9 P2.10
NetP2_11: P2.11 P2.12 U5.5 | length 20.8
  Bottom Layer w0.254: 20.955,8.319 29.845,8.319 30.226,7.938
  Bottom Layer w0.8: U5.5 18.796,9.334 18.879,9.334 19.621,8.592 20.955,8.592 ; 30.226,7.938 P2.12
  Bottom Layer w1: P2.11 P2.12
NetP2_13: P2.13 P2.14 U5.6 | length 20.6
  Bottom Layer w0.254: 23.56,8.827 31.877,8.827 32.449,8.255
  Bottom Layer w0.8: U5.6 21.336,9.715 21.356,9.715 21.971,9.1 23.56,9.1 ; 32.449,8.255 P2.14
  Bottom Layer w1: P2.13 P2.14
NetP2_15: P2.15 P2.16 U5.7 | length 20.2
  Bottom Layer w0.254: 25.781,9.335 33.845,9.335 34.29,8.89
  Bottom Layer w0.8: U5.7 23.876,10.275 24.543,9.608 25.781,9.608 ; 34.29,8.89 34.354,8.89 P2.16
  Bottom Layer w1: P2.15 P2.16
NetP2_17: P2.17 P2.18 U5.8 | length 20.1
  Bottom Layer w0.254: 28.29,9.843 35.844,9.843 36.289,9.398 36.322,9.398
  Bottom Layer w0.8: U5.8 26.416,10.497 26.797,10.116 28.29,10.116 ; 36.322,9.398 36.386,9.398 P2.18
  Bottom Layer w1: P2.17 P2.18
NetP2_19: P2.19 P2.20 U5.9 | length 20
  Bottom Layer w0.254: 30.422,10.351 30.612,10.541 30.802,10.351 37.909,10.351 38.227,10.033
  Bottom Layer w0.8: U5.9 28.956,10.941 29.273,10.624 30.422,10.624 ; 38.227,10.033 38.291,10.033 P2.20
  Bottom Layer w1: P2.19 P2.20
NetP2_21: P2.21 P2.22 U6.2 | length 10.9
  Bottom Layer w1: U6.2@41.465,11.748 41.465,9.399 P2.22 P2.21
NetP2_23: P2.23 P2.24 U6.3 | length 10.9
  Bottom Layer w0.254: P2.24 P2.24@48.26,5.652
  Bottom Layer w1: U6.3 44.069,9.843 P2.24@48.26,5.652 ; P2.23 P2.24
NetP2_25: P2.25 P2.26 U6.4 | length 10.9
  Bottom Layer w0.254: P2.26 P2.26@50.8,5.652
  Bottom Layer w1: U6.4 46.609,9.843 P2.26@50.8,5.652 ; P2.25 P2.26
NetP2_27: P2.27 P2.28 U6.5 | length 10.9
  Bottom Layer w0.254: P2.28 P2.28@53.34,5.652
  Bottom Layer w1: U6.5 49.149,9.843 P2.28@53.34,5.652 ; P2.27 P2.28
NetP2_29: P2.29 P2.30 U6.6 | length 10.9
  Bottom Layer w1: U6.6 51.689,9.335 P2.30 P2.29
NetP2_31: P2.31 P2.32 U6.7 | length 10.9
  Bottom Layer w1: U6.7 54.229,9.335 P2.32 P2.31
NetP2_33: P2.33 P2.34 U6.8 | length 10.9
  Bottom Layer w1: U6.8 56.769,9.335 P2.34 P2.33
NetP2_35: P2.35 P2.36 U6.9 | length 10.9
  Bottom Layer w0.254: P2.36 P2.36@63.5,5.271
  Bottom Layer w1: U6.9 59.309,9.462 P2.36@63.5,5.271 ; P2.35 P2.36
NetP2_37: P2.37 P2.38 U7.2 | length 11.7
  Bottom Layer w0.254: U7.2@72.136,11.24 U7.2
  Bottom Layer w1: P2.37 P2.38 U7.2@72.136,11.24
NetP2_39: P2.39 P2.40 U7.3 | length 11.7
  Bottom Layer w1: P2.39 P2.40 68.58,5.652 U7.3
NetP2_41: P2.41 P2.42 U7.4 | length 11.7
  Bottom Layer w1: P2.41 P2.42 71.12,5.652 U7.4
NetP2_43: P2.43 P2.44 U7.5 | length 11.7
  Bottom Layer w0.254: P2.44 P2.44@73.66,5.652
  Bottom Layer w1: P2.43 P2.44 ; P2.44@73.66,5.652 U7.5
"NetPower 1_1": "Power 1.1" S1.2 S1.5 | length 21.7
  Bottom Layer w0.254: S1.2@4.953,23.94 S1.2@5.207,24.194 ; 5.207,45.202 5.461,45.456
  Bottom Layer w1.2: S1.2@5.207,24.194 5.207,45.202
NetR7_2: R7.2 U1.8 | length 36.1
  Bottom Layer w0.254: R7.2@83.335,46.142 R7.2@84.074,45.403
  Bottom Layer w1.5: U1.8 57.785,49.911 61.554,46.142 R7.2@83.335,46.142
NetR8_2: R8.2 U6.1 | length 3.8
  Bottom Layer w1: R8.2 U6.1
NetR9_2: R9.2 U7.1 | length 4.2
  Bottom Layer w1: R9.2 U7.1
NetR10_2: R10.2 U1.3 | length 5.9
  Bottom Layer w0.5: U1.3 70.485,59.246 72.748,61.509 R10.2
NetR11_2: R11.2 U1.4 | length 9.8
  Bottom Layer w0.254: R11.2@74.018,64.326 R11.2
  Bottom Layer w0.7: U1.4 67.945,59.627 72.644,64.326 R11.2@74.018,64.326
NetR15_1: R15.1 R18.1 | length 20.2
  Bottom Layer w0.254: 30.551,73.462 30.861,73.152
  Bottom Layer w0.5: 30.551,73.462 30.551,82.621 30.988,83.058
  Bottom Layer w0.7: 30.988,83.058 R18.1@33.846,85.915
  Bottom Layer w1: 30.861,73.089 R15.1
NetR15_2: R15.2 U1.17 | length 4.8
  Bottom Layer w1: U1.17@34.925,57.595 34.925,62.421
NetR16_1: R16.1 R17.1 | length 29
  Bottom Layer w0.254: R16.1 R16.1@32.512,69.152
  Bottom Layer w0.3: 32.185,87.684 32.385,87.684
  Bottom Layer w0.5: 32.185,87.684 29.797,85.296 29.797,71.613 R16.1 ; 32.385,87.684 34.808,87.684 35.56,86.932 35.56,85.281 R17.1
NetR16_2: R16.2 U1.18 | length 3.7
  Bottom Layer w0.254: R16.2@32.258,61.278 R16.2@32.512,61.024
  Bottom Layer w1: U1.18@32.512,57.722 R16.2@32.512,61.024
NetR17_2: R17.2 U2.10 | length 14.4
  Bottom Layer w0.8: R17.2 48.514,83.503 49.022,82.995 U2.10
NetR18_2: R18.2 U2.12 | length 18.1
  Bottom Layer w0.8: R18.2 48.641,86.043 51.562,83.122 U2.12
NetU1_16: U1.16 U2.5 | length 17.6
  Bottom Layer w0.8: 38.036,65.659 42.418,70.041
  Bottom Layer w1: U1.16@37.592,57.595 37.592,65.215 38.036,65.659 ; 42.418,70.041 42.672,70.295 U2.5
NetU1_19: U1.19 U2.7 | length 27.4
  Bottom Layer w0.254: 41.402,73.914 41.847,74.359
  Bottom Layer w0.3: 41.148,70.358 41.402,70.612 41.402,73.914 ; 41.847,74.359 44.709,74.359
  Bottom Layer w0.4: 44.709,74.359 U2.7@45.212,73.856
  Bottom Layer w0.5: 35.56,64.707 41.148,70.295
  Bottom Layer w0.8: 29.972,63.31 31.369,64.707 35.56,64.707
  Bottom Layer w1: U1.19@29.972,57.849 29.972,63.31
NetU2_13: 
NetU3_3: pad.1@9.906,66.462 pad.3@9.906,60.366 | length 6.1
  Bottom Layer w1: pad.3@9.906,60.366 pad.1@9.906,66.462
VCC: C6.1 C8.1 P2.45 P2.46 P2.47 P2.48 P2.49 P2.50 pad. pad.1@37.592,68.771 pad.2@45.212,68.771 pad.3@9.906,71.542 R1.2 R3.1 R8.1 R9.1 U1.10 U1.30 U1.32 U2.6 U2.9 U2.11 U5.1 U5.20 U6.20 U7.20 | length 412.6
  Bottom Layer w0.254: U5.20 U5.20@8.636,20.257 ; pad.3@9.779,71.669 pad.3@9.906,71.542 ; pad.@10.287,31.75 pad.@10.287,32.322 ; 19.061,6.275 23.887,6.275 23.948,6.214 ; C6.1@23.495,69.279 C6.1 ; U6.20 U6.20@39.116,19.368 ; U2.6 U2.6@44.445,76.396 ; pad.2@44.577,68.771 44.6,68.748 pad.2@45.235,68.748 ; U1.30@50.038,42.355 U1.30@50.292,42.609 ; U1.10@52.832,57.15 U1.10@52.832,57.849 ; U7.20@69.469,19.241 U7.20 ; P2.46@76.2,5.017 76.327,5.144 P2.46
  Bottom Layer w0.3: 40.386,20.638 42.291,20.638 ; U2.6@44.445,76.396 U2.9
  Bottom Layer w0.4: U5.20@8.636,20.257 11.001,22.336 ; 12.382,17.908 12.382,20.384 ; 23.948,6.214 24.193,5.969 24.193,3.429 24.196,3.426 24.196,1.839 24.765,1.27 ; 42.291,20.638 42.799,20.13
  Bottom Layer w0.5: 24.765,1.27 79.946,1.27 P2.49 ; U6.20@39.116,19.368 40.259,20.511 ; 42.799,17.78 42.799,20.13 ; pad.2@45.212,68.771 pad.2@45.235,68.748 ; U2.9 U2.11 ; U1.30@50.038,41.783 U1.30@50.038,42.355
  Bottom Layer w0.6: U5.20@9.04,19.368 10.691,21.019 ; 16.383,52.959 17.653,52.959
  Bottom Layer w0.7: 10.691,21.019 11.747,21.019 12.382,20.384 ; 17.653,52.959 24.289,59.595 24.416,59.595 ; 21.018,63.628 23.812,60.834 23.812,59.183 ; 31.013,66.383 35.204,66.383 pad.1@37.592,68.771 ; U2.11 C8.1@53.848,69.533 ; 78.816,86.792 78.816,83.173 80.264,81.725
  Bottom Layer w0.8: U5.1 8.636,7.556 11.112,5.08 17.907,5.08 18.796,5.969 ; R3.1 10.732,73.533 ; pad.@10.287,31.75 12.827,29.21 12.827,23.622 11.541,22.336 11.001,22.336 ; 42.926,17.59 44.164,16.352 ; U1.10@52.832,58.442 52.832,60.389 55.245,62.802 55.245,67.564 53.975,68.834 C8.1 ; 55.245,41.275 U1.32 ; 71.246,86.867 71.246,83.059 71.882,82.423 ; 89.535,81.725 R1.2
  Bottom Layer w0.9: 12.382,17.908 13.462,16.828 ; pad.2@45.235,68.748 47.244,68.748 47.752,69.256 U2.9 ; 80.264,81.725 89.535,81.725
  Bottom Layer w1: U5.1 U5.20 ; R3.1 7.112,74.105 7.112,72.304 7.874,71.542 pad.3@9.906,71.542 ; pad.@10.16,39.942 10.16,46.736 16.129,52.705 ; 10.732,73.533 12.89,73.533 16.192,76.835 22.035,76.835 22.479,76.391 22.479,70.775 C6.1@23.622,69.632 ; 13.462,16.828 32.639,16.828 R8.1 U6.20 ; 21.018,63.628 21.018,66.802 C6.1@23.495,69.279 ; 23.812,59.183 31.013,66.383 ; 44.513,16.447 67.818,16.447 69.469,18.098 U7.20@69.469,19.241 ; U1.30@50.038,41.783 52.324,39.497 53.467,39.497 55.245,41.275 ; U1.10@52.832,57.15 55.245,54.737 ; R9.1 U7.20 ; 71.246,86.867 72.39,88.011 77.597,88.011 78.816,86.792 ; P2.46@76.2,5.017 P2.45 P2.47 P2.49 P2.50 P2.48 P2.46@76.327,5.144
  Bottom Layer w1.1: 71.882,82.042 71.882,82.423
  Bottom Layer w1.3: U1.32 55.245,54.737
  Bottom Layer w1.5: U1.10 52.705,58.315 52.832,58.442 57.89,63.5 57.912,63.5 65.001,70.589 67.795,70.589 71.882,74.676 71.882,82.042
pads on no net: "ISP 1.8" "ISP 1.9" S1.3 S1.4 S3.3 S3.4 U1.5 U1.14 U1.15 U7.6 U7.7 U7.8 U7.9 U7.11 U7.12 U7.13 U7.14

## Silkscreen, mask and mechanical layers (free items; w line width, h text height)
Top Overlay:
  lines w0.2: 10.16,33.363 10.16,33.592 ; 10.16,38.901 10.16,38.672 ; 20.447,52.794 20.447,53.023 ; 20.447,58.332 20.447,58.103 ; 20.472,75.121 20.701,75.121 ; 25.781,75.121 26.01,75.121 ; 38.633,68.771 38.862,68.771 ; 44.171,68.771 43.942,68.771 ; 65.405,91.021 65.405,91.25 ; 65.405,96.559 65.405,96.33 ; 10.16,38.672 9.398,38.672 9.398,33.592 10.922,33.592 10.922,38.672 10.16,38.672 ; 20.447,58.103 19.685,58.103 19.685,53.023 21.209,53.023 21.209,58.103 20.447,58.103 ; 20.701,75.121 20.701,74.359 25.781,74.359 25.781,75.883 20.701,75.883 20.701,75.121 ; 43.942,68.771 43.942,69.533 38.862,69.533 38.862,68.009 43.942,68.009 43.942,68.771 ; 65.405,96.33 66.167,96.33 66.167,91.25 64.643,91.25 64.643,96.33 65.405,96.33
  lines w0.305: -2.566,54.042 -2.566,54.804 -3.582,54.804 -3.582,54.042 -4.64,54.042 -4.64,55.455 -4.64,61.408 -3.582,61.408 -3.582,60.646 -2.566,60.646 -2.566,61.408 ; -2.566,65.218 -2.566,65.98 -3.582,65.98 -3.582,65.218 -4.64,65.218 -4.64,66.631 -4.64,72.584 -3.582,72.584 -3.582,71.822 -2.566,71.822 -2.566,72.584 ; -2.439,54.042 4.826,54.042 4.826,61.408 -2.439,61.408 ; -2.439,65.218 4.826,65.218 4.826,72.584 -2.439,72.584 ; 4.826,55.286 8.382,55.286 ; 4.826,57.826 8.382,57.826 ; 4.826,60.366 8.382,60.366 ; 4.826,66.462 8.382,66.462 ; 4.826,69.002 8.382,69.002 ; 4.826,71.542 8.382,71.542
  text "0" at 66.421,93.028 h1.52 r90
  text "0" at 23.876,76.137 h1.52 r180
  text "0" at 40.64,67.755 h1.52
  text "7805" at 4.318,67.056 h1 r90
  text "U4" at 2.54,66.04 h0.8 r90
  text "7809" at 4.191,55.626 h1 r90
  text "U3" at 2.54,54.864 h0.8 r90
  text "0" at 21.463,54.801 h1.52 r90
  text "0" at 11.176,35.37 h1.52 r90
Mechanical 1:
  the board outline again, w0.254

## Text inside footprints (layer, text, board x,y; h text height)
Bar1: Top Overlay "1" at 15.748,24.552 h1.27; Top Overlay "1" at 37.719,28.997 h1.27; Top Overlay "1" at 38.481,28.997 h1.27; Top Overlay "10" at 37.084,25.06 h1.27; Top Overlay "20" at 15.24,28.997 h1.27
Bar2: Top Overlay "1" at 56.134,24.552 h1.27; Top Overlay "1" at 78.105,28.997 h1.27; Top Overlay "1" at 78.867,28.997 h1.27; Top Overlay "10" at 77.47,25.06 h1.27; Top Overlay "20" at 55.626,28.997 h1.27
"ISP 1": Top Overlay "2" at 91.002,37.533 h1.5 r90; Top Overlay "1" at 93.632,38.033 h1.5 r90; Top Overlay "10" at 90.907,52.523 h1.5 r90; Top Overlay "9" at 93.632,52.523 h1.5 r90
P2: Top Overlay "2" at 17.78,4.636 h1.27; Top Overlay "50" at 82.804,4.636 h1.27; Top Overlay "1" at 17.78,2.096 h1.27; Top Overlay "49" at 82.804,2.096 h1.27
U2: Top Overlay "15" at 54.737,74.867 h0.76; Top Overlay "2" at 38.735,77.534 h0.76; Top Overlay "14" at 53.594,77.534 h0.76; Top Overlay "1" at 37.465,74.867 h0.76